# Altium PCB S7CAS-PLEIADES-CARTE-MERE_P01.PcbDoc (part 9 of 9)
Units mil, origin at the board's own origin, x right, y up, seen from the top; angles counter-clockwise.
Board outline 6153 x 3696 mil, 16 copper layers (Top, Ground Plane 1, Signal Layer 1, Ground Plane 2, Signal Layer 2, Ground Plane 3, Power Plane, Ground Plane 4, Ground Plane 5, Power Plane 2, Ground Plane 6, Signal Layer 3, Ground Plane 7, Signal Layer 4, Ground Plane 8, Bottom), stack 75.282 mil thick; 430 components, 328 nets, 2174 pads, 2158 vias.
Unrouted connection lines stored in the file: 202.
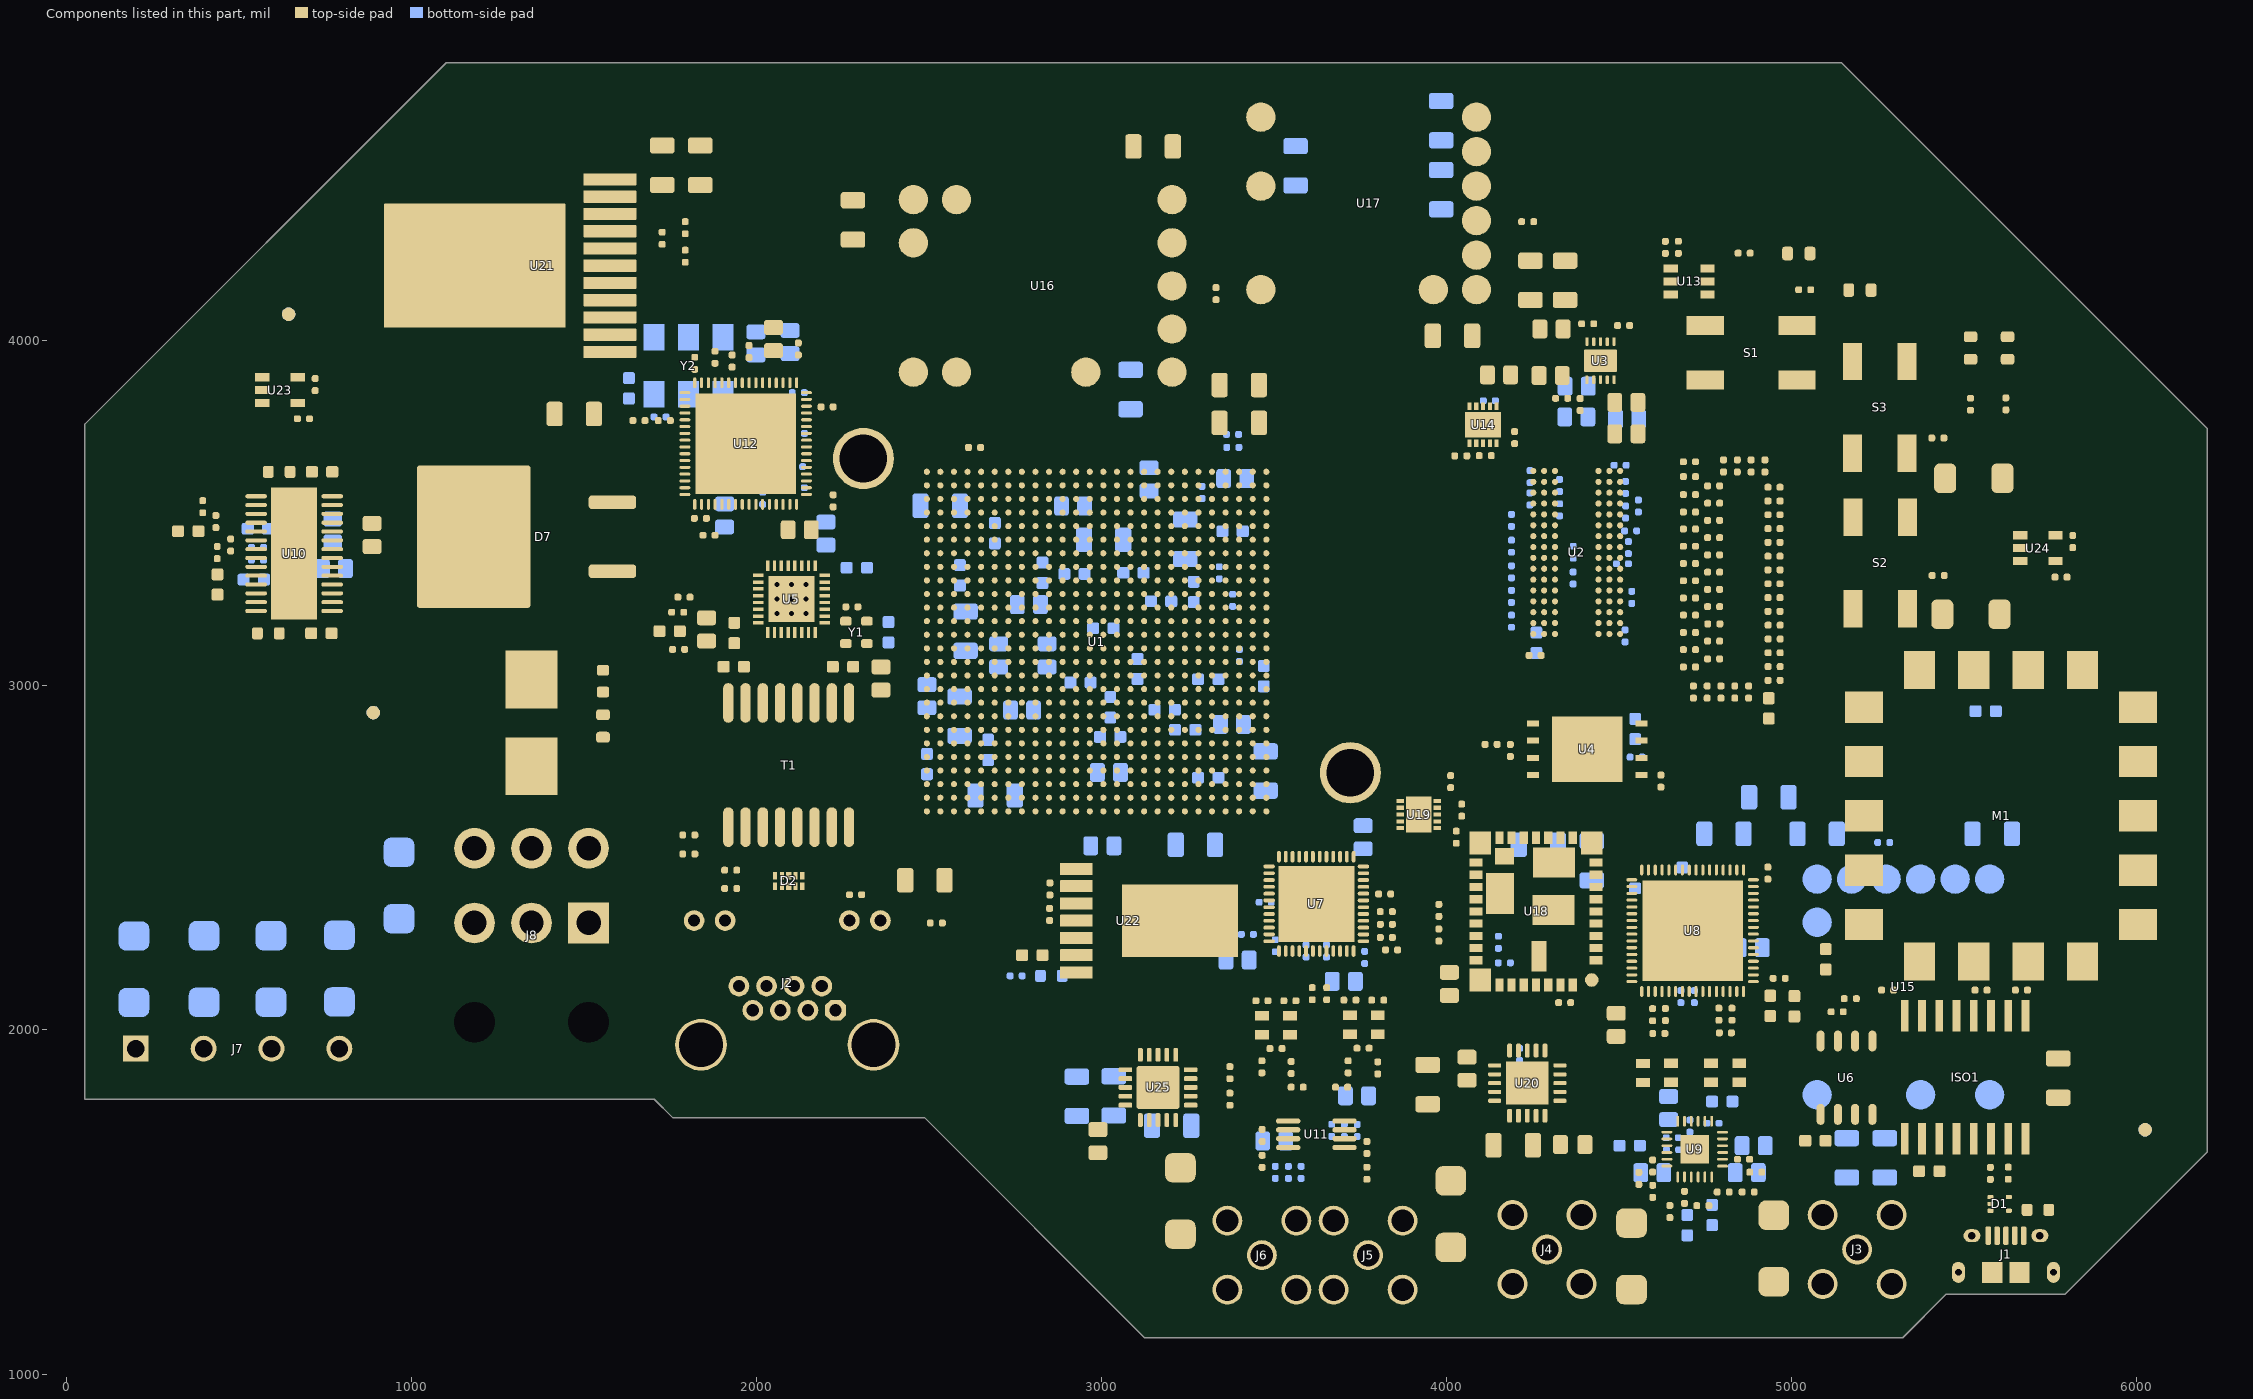
[diagram p21: the components of this part, seen from the top]

## Polygon pours and split planes (outlines as drawn) (continued)
5V on Power Plane 2 (split plane): 26 vertices, not listed, extent 73.1,1128.1 6185.9,4783.9
GND_ETH on Ground Plane 6 (split plane): 2448.05,1766.1 1765.32,1766.1 1728.08,1803.34 1728.08,2633.04 1732.96,2637.92 2448.05,2637.92
GND_USB on Ground Plane 6 (split plane): 5866.93,1770.76 5866.93,1335.35 5785.68,1254.1 5449,1254.1 5445.08,1253.71 5441.31,1252.57 5437.83,1250.71 5434.79,1248.21 5433.07,1246.49 5433.07,1604.76 5663.24,1834.93 5802.76,1834.93
GND on Ground Plane 6 (split plane): 65 vertices, not listed, extent 73.1,1128.1 6185.9,4783.9
GND_ETH on Ground Plane 7 (split plane): 2448.05,1766.1 1765.32,1766.1 1728.08,1803.34 1728.08,2633.04 1732.96,2637.92 2448.05,2637.92
GND_USB on Ground Plane 7 (split plane): 5866.93,1770.76 5866.93,1335.35 5785.68,1254.1 5449,1254.1 5445.08,1253.71 5441.31,1252.57 5437.83,1250.71 5434.79,1248.21 5433.07,1246.49 5433.07,1604.76 5663.24,1834.93 5802.76,1834.93
GND on Ground Plane 7 (split plane): 65 vertices, not listed, extent 73.1,1128.1 6185.9,4783.9
GND_ETH on Ground Plane 8 (split plane): 2448.05,1766.1 1765.32,1766.1 1726.44,1804.98 1726.44,2631.4 1732.96,2637.92 2448.05,2637.92
GND_USB on Ground Plane 8 (split plane): 5866.93,1770.76 5866.93,1335.35 5785.68,1254.1 5449,1254.1 5445.08,1253.71 5441.31,1252.57 5437.83,1250.71 5434.79,1248.21 5433.07,1246.49 5433.07,1604.76 5663.24,1834.93 5802.76,1834.93
GND on Ground Plane 8 (split plane): 67 vertices, not listed, extent 73.1,1128.1 6185.9,4783.9

## Other copper
Ground Plane 2 (plane layer: these items are gaps in the copper):
  lines w30: 5418,1203 5418,1611 5657,1850 5809,1850 5882,1777 5882,1325
  lines w50: 1701.36,2641.73 1720.93,2661.3 ; 1703,1790 1703,2643.43 ; 1722.57,2663 2460,2663 2473.13,2649.87 ; 2471.49,1761.08 2471.49,2648.17
Power Plane (plane layer: these items are gaps in the copper):
  lines w10: 2430.98,3715.22 2206.42,3939.78 1704.13,3939.78 530.78,3939.78 257,3666 257,3323 509,3071 928.92,3071 1129,3271.08 1129,3651 1197.37,3719.37 1482.84,3719.37 1569.13,3633.08 1569.13,3613.4 1569.13,3120.78 1569.13,3111.97 2259.32,2421.78 2361.42,2421.78 2570.42,2630.78 3321.13,2630.78 ; 2435.13,3719.37 2933.98,4218.22 3958.98,4218.22 4067.24,4218.22 4067.24,4265.48 4372.76,4571 4733,4571 4862,4442 4862,4164 4921,4105 5315,4105 5529.39,3890.61 5529.39,3229.39 5481,3181 5171.55,3181 5035,3317.55 5035,3679.7 4751.84,3962.86 4393.11,3962.86 4164.98,3734.72 4164.98,2975.93 4299.13,2841.78 4971.69,2841.78 5287.69,3157.78 5585.6,3157.78 5585.6,2794.25 5585.6,2772.25 5114.89,2301.54 5114.89,1816.12 4534.23,2396.78 3472.83,2396.78 3321.13,2548.48 3321.13,2633.78 ; 4166.13,2317.78 4170.13,2313.78 ; 3193.13,1666.4 3193.13,1744.78 3239.13,1790.78 3241.13,1788.78 4814.13,1788.78 4860.13,1742.78 4860.13,1493.78 4857.13,1490.78 4687.13,1490.78 4565.13,1612.78 3422.13,1612.78 3391.13,1643.78 3279.13,1643.78 3239.28,1643.78 3215.75,1643.78 3203.75,1655.78 3193.13,1666.4 ; 4195.98,3119.22 4195.98,3700.22 4299.56,3803.8 4299.56,3811.22 4402.16,3811.22 4409.57,3803.8 4409.57,3693.69 4519.98,3583.28 4519.98,3060.56 4511.71,3052.29 4262.91,3052.29 4195.98,3119.22 ; 4436.98,3685.22 4608.98,3513.22 4608.98,2992.22 4629.98,2971.22 4857.98,2971.22 4908.98,2920.22 4966.98,2920.22 4985.98,2939.22 4985.98,3000.22 4956.98,3029.22 4956.98,3622.22 4909.98,3669.22 4615.98,3669.22 4538.98,3746.22 4538.98,3898.58 4444.34,3898.58 4436.98,3891.22 4436.98,3685.22
  lines w30: 4166.13,2317.78 4013.05,2317.78 3878.42,2183.15 3780.5,2183.15 3756.13,2158.78 3405.13,2158.78 2973.13,2590.78 2698.13,2590.78 2485.13,2377.78 2180.48,2377.78 1524.13,3034.13 1524.13,3608.78 1452.13,3680.78 1212.13,3680.78 1172.13,3640.78 1172.13,2952.78 2042.13,2082.78 3001.13,2082.78 3166.13,1917.78 4005.13,1917.78 4170.13,2082.78 4170.13,2246.78 4170.13,2313.78
Ground Plane 1 (plane layer: these items are gaps in the copper):
  lines w30: 5418,1203 5418,1611 5657,1850 5809,1850 5882,1777 5882,1325
  lines w50: 1703,1790 1703,2643.43 1722.57,2663 2460,2663 2473.13,2649.87 2473.13,1762.78
Ground Plane 7 (plane layer: these items are gaps in the copper):
  lines w30: 5418,1203 5418,1611 5657,1850 5809,1850 5882,1777 5882,1325
  lines w50: 1703,1790 1703,2643.43 1722.57,2663 2460,2663 2473.13,2649.87 2473.13,1762.78
Ground Plane 3 (plane layer: these items are gaps in the copper):
  lines w30: 5418,1203 5418,1611 5657,1850 5809,1850 5882,1777 5882,1325
  lines w50: 1703,1790 1703,2643.43 1722.57,2663 2460,2663 2473.13,2649.87 2473.13,1762.78
Ground Plane 4 (plane layer: these items are gaps in the copper):
  lines w30: 5418,1203 5418,1611 5657,1850 5809,1850 5882,1777 5882,1325
  lines w50: 1703,1790 1703,2643.43 1722.57,2663 2460,2663 2473.13,2649.87 2473.13,1762.78
Power Plane 2 (plane layer: these items are gaps in the copper):
  lines w10: 3183.98,2930.22 3202.98,2949.22 ; 3350.98,3902.22 3268.98,3902.22 3233.98,3867.22 2923.98,3867.22 2886.98,3830.22 2886.98,3421.37 2679.72,3421.37 2444.13,3185.78 2444.13,2857.78 2531.01,2770.9 3024.65,2770.9 3202.98,2949.22 ; 3351.98,3901.22 3351.98,3760.22 3280.98,3689.22 3254.98,3689.22 3239.98,3674.22 3239.98,3333.22 3130.98,3224.22 3124.98,3218.22 3124.98,3078.22 3202.98,3000.22 3202.98,2949.22 ; 3437.81,3103.78 3462.8,3128.78 4485.13,3128.78 5136.13,2477.78 5136.13,2298.38 5051.61,2213.86 4665.33,2213.86 4435.13,2444.06 4435.13,2532.78 4197.01,2770.9 4045.24,2770.9 4012.71,2738.36 4012.71,2431.36 3800.13,2218.78 3468,2218.78 3239.98,2446.8 3239.98,2906.63 3462.13,3128.78 3471.13,3128.78 ; 3581.82,1817.78 3581.82,1717.85 3581.82,1611.78 4566.13,1611.78 4687.13,1490.78 4857.13,1490.78 4860.13,1493.78 4860.13,1742.78 4784.13,1818.78 3581.82,1818.78 ; 3144.29,3085.86 3144.29,3203.97 3262.4,3322.08 3262.4,3424.05 3262.4,3661.22 3722.73,3661.22 4152.98,3661.22 4308.03,3816.28 4308.03,3818.28 4308.03,3917.58 4488.61,3917.58 4516.98,3889.22 4516.98,3341.22 4464.25,3288.49 3576.66,3288.49 3291.55,3003.39 3226.76,3003.39 3144.29,3085.86 ; 3419.88,2145.02 3499.13,2065.78 5081.13,2065.78 5110.13,2094.78 5110.13,2134.78 5050.13,2194.78 4835.69,2194.78 4790.69,2149.78 4511.78,2149.78 4222.13,2439.44 4222.13,2725.7 4197.04,2750.78 4057.38,2750.78 4038.13,2731.53 4038.13,2420.22 3816.69,2198.78 3419.88,2198.78 3419.88,2145.02
Ground Plane 5 (plane layer: these items are gaps in the copper):
  lines w30: 5418,1611 5418,1203 5418,1611 ; 5418,1611 5657,1850 ; 5418,1611 5657,1850 ; 5657,1850 5809,1850 ; 5657,1850 5809,1850 ; 5809,1850 5882,1777 ; 5809,1850 5882,1777 ; 5882,1777 5882,1325 5882,1777
  lines w50: 1703,1790 1703,2643.43 1722.57,2663 ; 1720.93,2661.3 2458.36,2661.3 2471.49,2648.17 ; 2473.13,1762.78 2473.13,2649.87
Ground Plane 6 (plane layer: these items are gaps in the copper):
  lines w30: 5418,1203 5418,1611 5657,1850 5809,1850 5882,1777 5882,1325
  lines w50: 1703,1790 1703,2643.43 1722.57,2663 2460,2663 2473.13,2649.87 2473.13,1762.78
Ground Plane 8 (plane layer: these items are gaps in the copper):
  lines w30: 5418,1203 5418,1611 5657,1850 5809,1850 5882,1777 5882,1325
  lines w50: 1701.36,1788.3 1701.36,2641.73 ; 1703,2643.43 1722.57,2663 2460,2663 2473.13,2649.87 2473.13,1762.78

## Silkscreen, mask and mechanical layers (free items; w line width, h text height)
Top Overlay:
  text "5V to 3V3" at 3663.53,4745.98 h60
  text "5V to 1V2" at 2728.45,4513.25 h60
  text "RESET" at 4814.41,4107.53 h60
  text "24V to 5V" at 854.24,4105.14 h60 r90
  text "3V3 to VTT" at 4606.47,3877.43 h60 r90
  text "IO2" at 5432.47,3769.6 h60 r90
  text "3V3 to 1V5" at 3976.24,3644.48 h60 r90
  text "IO1" at 5431.4,3380.87 h60 r90
  text "24V" at 1604.13,2865.78 h60
  text "5V to 3V3A" at 3543.53,2612.66 h60
  text "24V to -8V" at 4175.84,2596.31 h60
  text "0" at 175,2200 h787.4
  text "24V to 6V" at 2911.34,2058.53 h60
  text "-8V to -5V" at 4122.22,1974.31 h60
  text "6V to 5V" at 3018.15,1784.15 h60 r90
  text "↑↑ IN ↑↑" at 4146.13,1147.78 h60
  text "↓↓ OUT ↓↓" at 3322.46,1134.78 h60
Bottom Overlay:
  rectangle: 1084,3016 1592.59,3319.27
  lines w5: 162,2555 162,3645 402,3645 402,2555 162,2555
  text ".Project_Name" at 3060,4377.28 h78.74
  text "Designed by:" at 1503.35,4259.51 h36
  text ".Project_Designer1" at 1465.98,4148.69 h36
  text ".Project_Designer2" at 1442.13,3995.69 h36
  text ".Project_Designer3" at 1450,3896.71 h36
  text ".Project_Revision" at 1495,3659.29 h30
  text "Revision" at 1450,3654.91 h30
  text ".Project_Global" at 355,3647.24 h39.37 r90
  text "Serial #" at 1592.59,3319.27 h39.37
  text "5V to 1V8" at 5664.66,2428.92 h60 r270
Board Outline:
  lines w4: 5531.01,2196.92 5532.63,2195.3 5532.63,2115.78
  lines w5: 55,3758 1101,4804 4961.73,4804 5146,4804 6206,3744 6206,1646 5794,1234 5628,1234 5449,1234 5323,1108
  lines w10: 53,3756 53,1799 1704,1799 1757,1746 2487.01,1746 3125.01,1108 5323,1108

## Text inside footprints (layer, text, board x,y; h text height)
D3: Top Overlay "+" at 4962.94,4270.72 h19.68
D4: Top Overlay "+" at 5139.94,4164.69 h19.68
D5: Top Overlay "+" at 5500.09,3917.94 h19.68 r90
D6: Top Overlay "+" at 5607.31,3917.94 h19.68 r90
D10: Top Overlay "+" at 1575.09,2940.39 h19.68 r270
J1: Top Assembly "Board Edge" at 5508.13,1202.99 h23.62
J7: Top Overlay "1" at 114.57,1982 h65; Top Assembly "INSERT WIRES ON THIS SIDE" at 110.17,1741.28 h31.5
U18: Top 3D Models "The 3D model is a 39pin instead of 41. For package representation only" at 4402.84,2194.17 h3.94 r90